# EAGLE board FLD Logic (autorouted) (EAGLE 6.5.0)
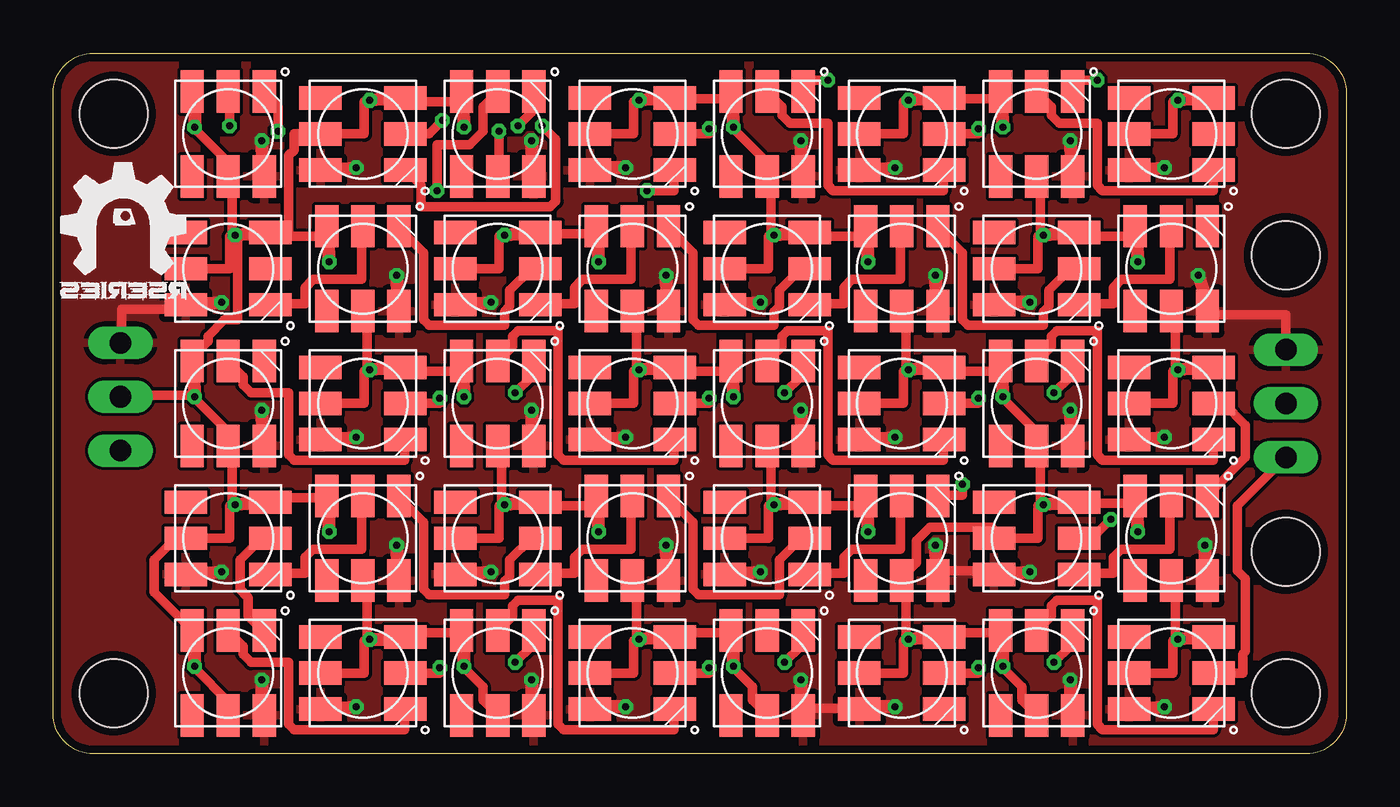
[diagram p0: board, top side]
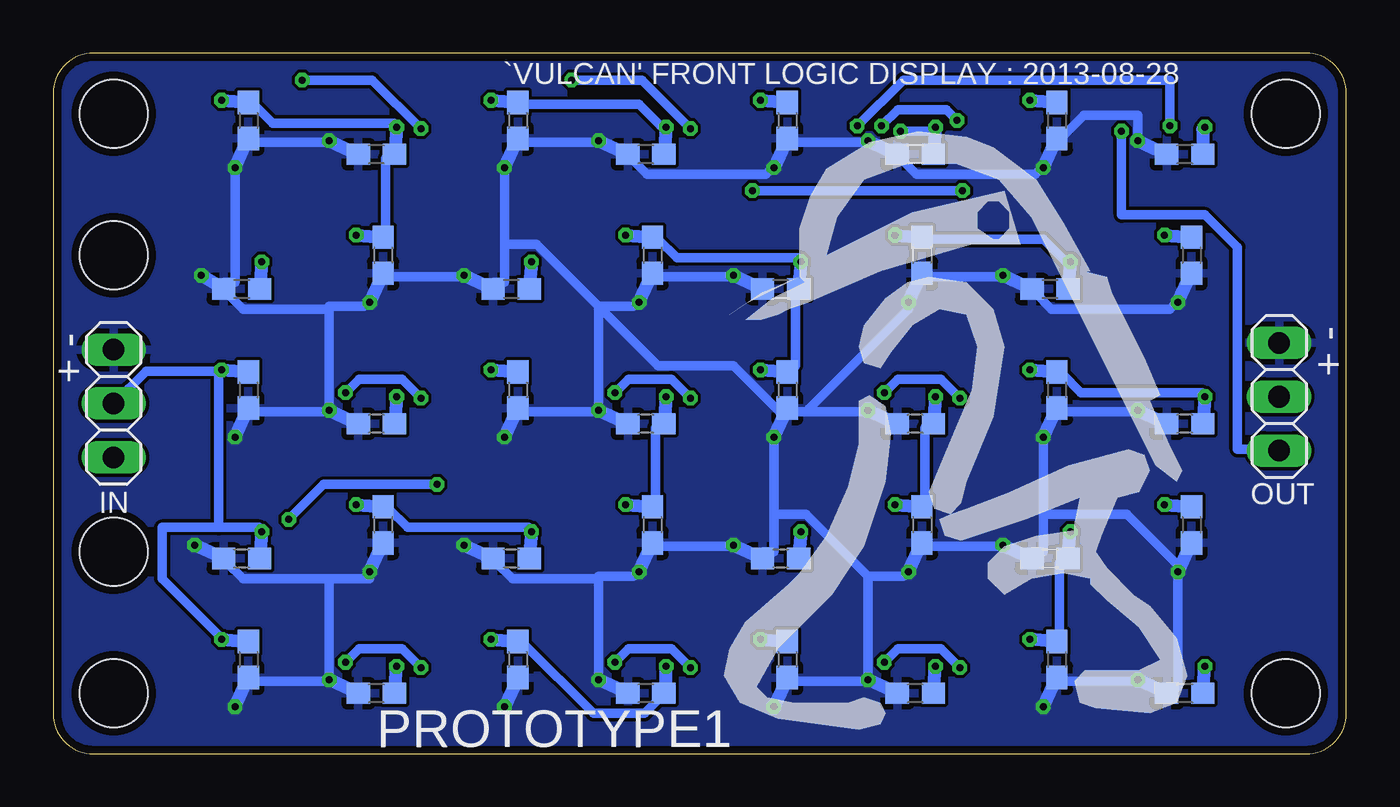
[diagram p1: board, bottom side, seen from below]

Size 60.96 x 33.02 mm. Coordinates in mm from the lower left corner, seen from the top.
Outline: 0,1.91 0,31.11 arc-90 1.91,33.02 59.06,33.02 arc-90 60.96,31.11 60.96,1.91 arc-90 59.06,0 1.91,0 arc-90 0,1.91
Copper layers (1*16): Top 0.0356mm / dielectric 1.5011mm / Bottom 0.0356mm
Design rules "LaenPCBOrder *": minimum track width 18mil, minimum drill 13mil, track to track 6mil, track to pad 6mil, pad to pad 6mil, via to via 6mil, smd to smd 6mil, copper to edge 15mil, drill to drill 6mil, minimum pad ring 7mil, minimum via ring 7mil, stop-mask expansion 4mil, vias tented up to drill 0mil, thermal gap 10mil
Holes 3.2 mm at 58.1,30.16 58.1,2.86 2.86,2.86 2.86,30.16 58.1,9.53 58.1,23.5

## Footprints (pad centres in the part's own frame; a part is rotated, then mirrored left to right if it is on the bottom)
C0603 = smd 1.1 x 1: 1 -0.85,0; 2 0.85,0
1X03 = drill 1.016 long: 1 -2.54,0; 2 0,0; 3 2.54,0
WS2812 = smd 2 x 1.1: DI 2,0; DO 2,-1.7; LEDVDD -2,0; NC -2,1.7; VDD 2,1.7; VSS -2,-1.7

## Placement (x,y rotation side)
C1  0.1uF  [C0603]  51.75,4.45 270 bottom
C2  0.1uF  [C0603]  45.72,2.86 180 bottom
C3  0.1uF  [C0603]  39.05,4.45 270 bottom
C4  0.1uF  [C0603]  33.02,2.86 180 bottom
C5  0.1uF  [C0603]  26.35,4.45 270 bottom
C6  0.1uF  [C0603]  20.32,2.86 180 bottom
C7  0.1uF  [C0603]  13.65,4.45 270 bottom
C8  0.1uF  [C0603]  7.62,2.86 180 bottom
C9  0.1uF  [C0603]  7.3,10.79 270 bottom
C10  0.1uF  [C0603]  13.97,9.21 180 bottom
C11  0.1uF  [C0603]  20,10.79 270 bottom
C12  0.1uF  [C0603]  26.67,9.21 180 bottom
C13  0.1uF  [C0603]  32.7,10.79 270 bottom
C14  0.1uF  [C0603]  39.37,9.21 180 bottom
C15  0.1uF  [C0603]  45.4,10.79 270 bottom
C16  0.1uF  [C0603]  52.07,9.21 180 bottom
C17  0.1uF  [C0603]  51.75,17.14 270 bottom
C18  0.1uF  [C0603]  45.72,15.56 180 bottom
C19  0.1uF  [C0603]  39.05,17.14 270 bottom
C20  0.1uF  [C0603]  33.02,15.56 180 bottom
C21  0.1uF  [C0603]  26.35,17.14 270 bottom
C22  0.1uF  [C0603]  20.32,15.56 180 bottom
C23  0.1uF  [C0603]  13.65,17.14 270 bottom
C24  0.1uF  [C0603]  7.62,15.56 180 bottom
C25  0.1uF  [C0603]  7.3,23.5 270 bottom
C26  0.1uF  [C0603]  13.97,21.91 180 bottom
C27  0.1uF  [C0603]  20,23.5 270 bottom
C28  0.1uF  [C0603]  26.67,21.91 180 bottom
C29  0.1uF  [C0603]  32.7,23.5 270 bottom
C30  0.1uF  [C0603]  39.37,21.91 180 bottom
C31  0.1uF  [C0603]  45.4,23.5 270 bottom
C32  0.1uF  [C0603]  52.07,21.91 180 bottom
C33  0.1uF  [C0603]  51.75,29.84 270 bottom
C34  0.1uF  [C0603]  45.72,28.26 180 bottom
C35  0.1uF  [C0603]  39.05,29.84 270 bottom
C36  0.1uF  [C0603]  33.02,28.26 180 bottom
C37  0.1uF  [C0603]  26.35,29.84 270 bottom
C38  0.1uF  [C0603]  20.32,28.26 180 bottom
C39  0.1uF  [C0603]  13.65,29.84 270 bottom
C40  0.1uF  [C0603]  7.62,28.26 180 bottom
IN  [1X03]  58.1,16.51 270 bottom
LED1  WS2812  [WS2812]  52.7,3.81 0 top
LED2  WS2812  [WS2812]  46.35,3.81 90 top
LED3  WS2812  [WS2812]  40,3.81 0 top
LED4  WS2812  [WS2812]  33.65,3.81 90 top
LED5  WS2812  [WS2812]  27.3,3.81 0 top
LED6  WS2812  [WS2812]  20.96,3.81 90 top
LED7  WS2812  [WS2812]  14.6,3.81 0 top
LED8  WS2812  [WS2812]  8.25,3.81 90 top
LED9  WS2812  [WS2812]  8.25,10.16 0 top
LED10  WS2812  [WS2812]  14.6,10.16 90 top
LED11  WS2812  [WS2812]  20.96,10.16 0 top
LED12  WS2812  [WS2812]  27.3,10.16 90 top
LED13  WS2812  [WS2812]  33.65,10.16 0 top
LED14  WS2812  [WS2812]  40,10.16 90 top
LED15  WS2812  [WS2812]  46.35,10.16 0 top
LED16  WS2812  [WS2812]  52.7,10.16 90 top
LED17  WS2812  [WS2812]  52.7,16.51 0 top
LED18  WS2812  [WS2812]  46.35,16.51 90 top
LED19  WS2812  [WS2812]  40,16.51 0 top
LED20  WS2812  [WS2812]  33.65,16.51 90 top
LED21  WS2812  [WS2812]  27.3,16.51 0 top
LED22  WS2812  [WS2812]  20.96,16.51 90 top
LED23  WS2812  [WS2812]  14.6,16.51 0 top
LED24  WS2812  [WS2812]  8.25,16.51 90 top
LED25  WS2812  [WS2812]  8.25,22.86 0 top
LED26  WS2812  [WS2812]  14.6,22.86 90 top
LED27  WS2812  [WS2812]  20.96,22.86 0 top
LED28  WS2812  [WS2812]  27.3,22.86 90 top
LED29  WS2812  [WS2812]  33.65,22.86 0 top
LED30  WS2812  [WS2812]  40,22.86 90 top
LED31  WS2812  [WS2812]  46.35,22.86 0 top
LED32  WS2812  [WS2812]  52.7,22.86 90 top
LED33  WS2812  [WS2812]  52.7,29.21 0 top
LED34  WS2812  [WS2812]  46.35,29.21 90 top
LED35  WS2812  [WS2812]  40,29.21 0 top
LED36  WS2812  [WS2812]  33.65,29.21 90 top
LED37  WS2812  [WS2812]  27.3,29.21 0 top
LED38  WS2812  [WS2812]  20.96,29.21 90 top
LED39  WS2812  [WS2812]  14.6,29.21 0 top
LED40  WS2812  [WS2812]  8.25,29.21 90 top
OUT  [1X03]  3.18,16.83 270 bottom
U$1  [RSERIES-OSHW-LOGO-SMALL]  6.67,28.26 270 bottom

## Library data of the parts
C1-C40 LED1-LED40 = adafruit
IN OUT = pinhead
U$1 = rseries

## Nets
+5V: C1.1 C2.1 C3.1 C4.1 C5.1 C6.1 C7.1 C8.1 C9.1 C10.1 C11.1 C12.1 C13.1 C14.1 C15.1 C16.1 C17.1 C18.1 C19.1 C20.1 C21.1 C22.1 C23.1 C24.1 C25.1 C26.1 C27.1 C28.1 C29.1 C30.1 C31.1 C32.1 C33.1 C34.1 C35.1 C36.1 C37.1 C38.1 C39.1 C40.1 IN.2 LED1.LEDVDD LED1.VDD LED2.LEDVDD LED2.VDD LED3.LEDVDD LED3.VDD LED4.LEDVDD LED4.VDD LED5.LEDVDD LED5.VDD LED6.LEDVDD LED6.VDD LED7.LEDVDD LED7.VDD LED8.LEDVDD LED8.VDD LED9.LEDVDD LED9.VDD LED10.LEDVDD LED10.VDD LED11.LEDVDD LED11.VDD LED12.LEDVDD LED12.VDD LED13.LEDVDD LED13.VDD LED14.LEDVDD LED14.VDD LED15.LEDVDD LED15.VDD LED16.LEDVDD LED16.VDD LED17.LEDVDD LED17.VDD LED18.LEDVDD LED18.VDD LED19.LEDVDD LED19.VDD LED20.LEDVDD LED20.VDD LED21.LEDVDD LED21.VDD LED22.LEDVDD LED22.VDD LED23.LEDVDD LED23.VDD LED24.LEDVDD LED24.VDD LED25.LEDVDD LED25.VDD LED26.LEDVDD LED26.VDD LED27.LEDVDD LED27.VDD LED28.LEDVDD LED28.VDD LED29.LEDVDD LED29.VDD LED30.LEDVDD LED30.VDD LED31.LEDVDD LED31.VDD LED32.LEDVDD LED32.VDD LED33.LEDVDD LED33.VDD LED34.LEDVDD LED34.VDD LED35.LEDVDD LED35.VDD LED36.LEDVDD LED36.VDD LED37.LEDVDD LED37.VDD LED38.LEDVDD LED38.VDD LED39.LEDVDD LED39.VDD LED40.LEDVDD LED40.VDD OUT.2
DIN: IN.3 LED1.DI
DOUT: LED40.DO OUT.3
GND: C1.2 C2.2 C3.2 C4.2 C5.2 C6.2 C7.2 C8.2 C9.2 C10.2 C11.2 C12.2 C13.2 C14.2 C15.2 C16.2 C17.2 C18.2 C19.2 C20.2 C21.2 C22.2 C23.2 C24.2 C25.2 C26.2 C27.2 C28.2 C29.2 C30.2 C31.2 C32.2 C33.2 C34.2 C35.2 C36.2 C37.2 C38.2 C39.2 C40.2 IN.1 LED1.VSS LED2.VSS LED3.VSS LED4.VSS LED5.VSS LED6.VSS LED7.VSS LED8.VSS LED9.VSS LED10.VSS LED11.VSS LED12.VSS LED13.VSS LED14.VSS LED15.VSS LED16.VSS LED17.VSS LED18.VSS LED19.VSS LED20.VSS LED21.VSS LED22.VSS LED23.VSS LED24.VSS LED25.VSS LED26.VSS LED27.VSS LED28.VSS LED29.VSS LED30.VSS LED31.VSS LED32.VSS LED33.VSS LED34.VSS LED35.VSS LED36.VSS LED37.VSS LED38.VSS LED39.VSS LED40.VSS OUT.1
N$1: LED4.DO LED5.DI
N$2: LED5.DO LED6.DI
N$3: LED3.DO
N$4: LED7.DO LED8.DI
N$5: LED6.DO LED7.DI
N$6: LED17.DO LED18.DI
N$7: LED9.DO LED10.DI
N$8: LED10.DO LED11.DI
N$9: LED12.DO LED13.DI
N$10: LED13.DO LED14.DI
N$11: LED1.DO LED2.DI
N$12: LED2.DO LED3.DI
N$13: LED11.DO LED12.DI
N$14: LED15.DO LED16.DI
N$15: LED14.DO LED15.DI
N$16: LED16.DO LED17.DI
N$17: LED18.DO LED19.DI
N$18: LED20.DO LED21.DI
N$19: LED21.DO LED22.DI
N$20: LED19.DO LED20.DI
N$21: LED23.DO LED24.DI
N$22: LED22.DO LED23.DI
N$23: LED24.DO
N$24: LED25.DO LED26.DI
N$25: LED26.DO LED27.DI
N$26: LED28.DO LED29.DI
N$27: LED29.DO LED30.DI
N$28: LED27.DO LED28.DI
N$29: LED31.DO LED32.DI
N$30: LED30.DO LED31.DI
N$31: LED32.DO
N$32: LED33.DO LED34.DI
N$33: LED34.DO LED35.DI
N$34: LED36.DO LED37.DI
N$35: LED37.DO LED38.DI
N$36: LED35.DO LED36.DI
N$37: LED39.DO LED40.DI
N$38: LED38.DO LED39.DI
N$41: LED8.DO LED9.DI

## Tracks (layer width: path | path; a pad name or v marks a point on that pad's centre or on a via)
+5V  (via drill 0.33, 0.33 pad 0.25)
  Top 0.457: 32.07,5.08 32.07,5.71 LED4.VDD 31.81,5.71 29.53,5.71 LED5.VDD | LED5.LEDVDD 27.37,3.81 27.37,5.33 v27.62,5.4 27.5,5.59 27.5,8 27.37,8.13 LED12.LEDVDD | LED4.LEDVDD 33.59,1.91 32.96,2.54 32.96,3.17 32.19,3.94 v32.07,4.13 | 44.77,5.08 44.77,5.71 LED2.VDD 44.51,5.71 42.23,5.71 LED3.VDD | LED3.LEDVDD 40.07,3.81 40.07,5.33 v40.32,5.4 40.2,5.59 40.2,8 40.07,8.13 LED14.LEDVDD 40.07,8.38 40.7,9.02 40.7,10.03 41.34,10.67 44.26,10.67 44.26,10.29 LED15.LEDVDD 46.42,10.16 46.42,11.68 v46.67,11.75 46.55,11.94 46.55,14.35 46.42,14.48 LED18.LEDVDD 46.42,14.73 46.42,15.11 44.89,16.64 v44.77,16.83 | LED2.LEDVDD 46.29,1.91 45.66,2.54 45.66,3.17 44.89,3.94 v44.77,4.13 | LED17.LEDVDD 52.77,16.51 52.77,18.03 v53.02,18.1 52.9,18.29 52.9,20.7 52.77,20.83 LED32.LEDVDD | LED19.LEDVDD 40.07,16.51 40.07,18.03 v40.32,18.1 40.2,18.29 40.2,20.7 40.07,20.83 LED30.LEDVDD | LED18.VDD 44.39,18.03 42.23,18.03 LED19.VDD | LED1.LEDVDD 52.77,3.81 52.77,5.33 v53.02,5.4 52.9,5.59 52.9,8 52.77,8.13 LED16.LEDVDD | LED16.VDD 50.74,11.81 48.58,11.81 LED15.VDD | LED11.LEDVDD 21.02,10.16 21.02,11.68 v21.27,11.75 21.15,11.94 21.15,14.35 21.02,14.48 LED22.LEDVDD | LED12.VDD 25.34,11.68 23.18,11.68 LED11.VDD | LED23.LEDVDD 14.67,16.51 14.67,18.03 v14.92,18.1 14.8,18.29 14.8,20.7 14.67,20.83 LED26.LEDVDD | LED22.VDD 18.99,18.03 16.83,18.03 LED23.VDD | 19.37,5.08 19.37,5.71 LED6.VDD 19.11,5.71 16.7,5.71 LED7.VDD 16.57,5.46 16.07,5.46 15.87,5.4 | LED7.LEDVDD 14.67,3.81 14.67,5.33 v14.92,5.4 14.8,5.59 14.8,8 14.67,8.13 LED10.LEDVDD | LED6.LEDVDD 20.89,1.91 20.26,2.54 20.26,3.17 19.49,3.94 v19.37,4.13
  Top 0.457: 6.67,5.08 6.67,5.71 LED8.VDD 6.41,5.97 4.76,7.62 4.76,9.14 5.78,10.16 LED9.LEDVDD 8.32,10.16 8.32,11.68 v8.57,11.75 8.45,11.94 8.45,14.35 8.32,14.48 LED24.LEDVDD 8.32,14.73 8.32,15.11 6.79,16.64 v6.67,16.83 6.41,16.89 3.24,16.89 OUT.2 | v6.67,4.13 6.79,3.94 8.19,2.54 8.19,1.91 LED8.LEDVDD | 13.02,11.43 13.02,12.06 LED10.VDD 12.76,12.06 10.48,12.06 LED9.VDD | LED37.LEDVDD 27.37,29.21 27.37,30.73 v27.62,30.8 | LED37.VDD 29.53,30.86 31.69,30.86 LED36.VDD | LED29.LEDVDD 33.72,22.86 33.72,24.38 v33.97,24.45 33.85,24.64 33.85,27.05 33.72,27.18 LED36.LEDVDD 33.72,27.43 33.72,27.81 32.19,29.34 v32.07,29.53 | LED30.VDD 38.04,24.38 35.88,24.38 LED29.VDD | LED31.LEDVDD 46.42,22.86 46.42,24.38 v46.67,24.45 46.55,24.64 46.55,27.05 46.42,27.18 LED34.LEDVDD | LED32.VDD 50.74,24.38 48.58,24.38 LED31.VDD | LED33.LEDVDD 52.77,29.21 52.77,30.73 v53.02,30.8 | LED35.LEDVDD 40.07,29.21 40.07,30.73 v40.32,30.8 | LED35.VDD 42.23,30.86 44.39,30.86 LED34.VDD | v21.02,29.34 21.02,27.3 LED38.LEDVDD | v14.92,30.8 14.67,30.73 14.67,29.21 LED39.LEDVDD 11.37,29.21 11.37,28.45 11.11,28.19 11.11,24.51 LED25.VDD 10.48,24.38 12.64,24.38 LED26.VDD | LED38.VDD 18.99,30.73 16.83,30.73 LED39.VDD | LED25.LEDVDD 8.32,22.86 8.32,24.38 v8.57,24.45 | v8.57,24.45 8.45,24.64 8.45,27.05 8.32,27.18 LED40.LEDVDD 8.32,27.43 8.32,27.81 6.79,29.34 v6.67,29.53 | LED13.LEDVDD 33.72,10.16 33.72,11.68 v33.97,11.75 33.85,11.94 33.85,14.35 33.72,14.48 LED20.LEDVDD | LED14.VDD 38.04,11.68 35.88,11.68 LED13.VDD | LED27.LEDVDD 21.02,22.86 21.02,24.38 v21.27,24.45 | LED27.VDD 23.18,24.51 25.34,24.51 LED28.VDD
  Top 0.457: LED21.LEDVDD 27.37,16.51 27.37,18.03 v27.62,18.1 27.5,18.29 27.5,20.7 27.37,20.83 LED28.LEDVDD | LED20.VDD 31.69,18.03 29.53,18.03 LED21.VDD | LED24.VDD 6.67,18.8 7.3,19.43 7.3,19.68 8.06,20.45 8.7,20.45 8.7,24.26 v8.57,24.45
  Top 0.61: v6.67,4.13 6.67,5.08 | v14.92,5.4 15.87,5.4 | v19.37,4.13 19.37,5.08 | LED5.VDD v27.62,5.4 | LED3.VDD v40.32,5.4 | LED1.VDD v53.02,5.4 | LED16.VDD v51.12,10.48 | LED15.VDD v46.67,11.75 | LED14.VDD v38.42,10.48 | LED13.VDD v33.97,11.75 | LED12.VDD v25.72,10.48 | LED11.VDD v21.27,11.75 | v13.02,10.48 13.02,11.43 | LED9.VDD v8.57,11.75 | LED24.VDD v6.67,16.83 | LED25.VDD v8.57,24.45 | LED26.VDD v13.02,23.18 | LED23.VDD v14.92,18.1 | LED22.VDD v19.37,16.83 | LED27.VDD v21.27,24.45 | LED21.VDD v27.62,18.1 | LED20.VDD v32.07,16.83 | LED19.VDD v40.32,18.1 | LED18.VDD v44.77,16.83 | LED17.VDD v53.02,18.1 | LED32.VDD v51.12,23.18 | LED31.VDD v46.67,24.45 | LED30.VDD v38.42,23.18 | LED29.VDD v33.97,24.45 | LED28.VDD v25.72,23.18 | LED39.VDD v14.92,30.8 | LED38.VDD v19.37,29.53 | LED37.VDD v27.62,30.8 | LED36.VDD v32.07,29.53 | LED35.VDD v40.32,30.8 | LED34.VDD v44.77,29.53 | LED33.VDD v53.02,30.8 | LED40.VDD 6.67,31.1 v6.67,29.53 | v32.07,4.13 32.07,5.08 | v44.77,4.13 44.77,5.08
  Bottom 0.457: C4.1 32.32,2.67 33.08,1.91 35.5,1.91 38.8,5.21 C3.1 | IN.2 56.58,18.03 53.28,18.03 v53.02,18.1 53.15,17.91 53.15,10.67 | 53.15,10.67 51.24,10.67 v51.12,10.48 | 53.15,10.67 55.82,10.67 55.82,8.26 53.15,5.59 v53.02,5.4 | C11.1 19.88,11.94 19.88,15.37 19.62,15.37 C22.1 | C7.1 13.53,5.59 13.53,9.02 13.27,9.02 C10.1 | C23.1 13.4,17.91 12.51,17.02 6.79,17.02 v6.67,16.83 | C33.1 51.5,30.61 50.61,29.72 44.89,29.72 v44.77,29.53 | C31.1 45.28,24.64 45.28,28.07 45.02,28.07 C34.1 | v32.07,29.53 32.32,29.59 33.34,30.61 38.8,30.61 C35.1 | v21.02,29.34 19.62,29.34 v19.37,29.53 | C28.1 25.97,21.72 25.97,18.29 26.23,18.29 C21.1 | C13.1 32.58,11.94 32.58,15.37 32.32,15.37 C20.1 | v13.02,23.18 13.27,23.24 14.29,24.26 19.75,24.26 C27.1 | C29.1 32.45,24.26 31.56,23.37 25.84,23.37 v25.72,23.18 | C15.1 45.15,11.56 44.26,10.67 38.54,10.67 v38.42,10.48
  Bottom 0.61: C8.1 v6.67,4.13 | C7.1 v14.92,5.4 | C6.1 v19.37,4.13 | v27.62,5.4 C5.1 | v40.32,5.4 C3.1 | v53.02,5.4 C1.1 | v51.12,10.48 C16.1 | v46.67,11.75 C15.1 | v38.42,10.48 C14.1 | v33.97,11.75 C13.1 | v25.72,10.48 C12.1 | v21.27,11.75 C11.1 | C10.1 v13.02,10.48 | v8.57,11.75 C9.1 | v6.67,16.83 C24.1 | v8.57,24.45 C25.1 | v13.02,23.18 C26.1 | v14.92,18.1 C23.1 | v19.37,16.83 C22.1 | v21.27,24.45 C27.1 | v27.62,18.1 C21.1 | v32.07,16.83 C20.1 | v40.32,18.1 C19.1 | v44.77,16.83 C18.1 | v53.02,18.1 C17.1 | v51.12,23.18 C32.1 | v46.67,24.45 C31.1 | v38.42,23.18 C30.1 | v33.97,24.45 C29.1 | v25.72,23.18 C28.1 | v14.92,30.8 C39.1 | v19.37,29.53 C38.1 | v27.62,30.8 C37.1 | v32.07,29.53 C36.1 | v40.32,30.8 C35.1 | v44.77,29.53 C34.1 | v53.02,30.8 C33.1 | v6.67,29.53 6.77,29.43 C40.1 | C4.1 32.07,2.86 v32.07,4.13 | C2.1 v44.77,4.13
DIN
  Top 0.457: LED1.DI 56.07,3.81 56.07,4.7 56.2,4.83 56.2,8.26 55.82,8.64 55.82,11.68 IN.3
DOUT  (via drill 0.33)
  Top 0.457: v10.6,29.34 10.6,30.48 9.97,31.11 LED40.DO
  Bottom 0.457: v10.6,29.34 10.6,25.4 6.67,25.4 5.14,23.88 5.14,14.35 3.24,14.35 OUT.3
GND  (via drill 0.33 pad 0.25)
  Top 0.457: 54.29,21.59 54.29,20.95 LED32.VSS 54.55,20.7 58.1,20.7 IN.1 | 24.76,27.43 25.21,27.43 LED37.VSS 25.46,27.56 25.84,27.56 26.03,27.62 | 35.56,27.56 35.62,27.56 LED36.VSS | 45.09,21.27 44.89,21.21 44.39,21.21 LED31.VSS | 10.16,2.22 9.97,2.29 LED8.VSS 9.84,2.41 9.84,2.54 | 22.54,2.54 22.54,2.41 LED6.VSS | 26.03,2.22 25.84,2.16 25.34,2.16 LED5.VSS | 47.94,2.54 47.94,2.41 LED2.VSS | 54.29,8.89 54.29,8.26 LED16.VSS | LED14.VSS 41.97,8.64 44.13,8.64 LED15.VSS | LED25.VSS 6.03,20.95 3.24,20.95 3.24,19.43 OUT.1 | 35.56,2.16 35.5,2.16 LED4.VSS | 35.24,2.41 35.37,2.41 LED4.VSS | 38.74,2.22 38.54,2.16 38.04,2.16 LED3.VSS 37.78,2.16 35.75,2.16 LED4.VSS
  Top 0.61: v9.84,3.49 9.84,2.54 | LED7.VSS v14.29,2.22 | v22.54,3.49 22.54,2.54 | v39.69,2.22 38.74,2.22 | LED13.VSS v33.34,8.57 | LED1.VSS v52.39,2.22 | v54.29,9.84 54.29,8.89 | LED15.VSS v46.04,8.57 | v41.59,9.84 LED14.VSS 41.71,8.46 | v28.89,9.84 LED12.VSS 29.01,8.46 | LED11.VSS v20.64,8.57 | v16.19,9.84 LED10.VSS 16.3,8.46 | LED9.VSS v7.94,8.57 | v9.84,16.19 LED24.VSS 9.96,14.81 | LED25.VSS v7.94,21.27 | v16.19,22.54 LED26.VSS 16.3,21.16 | LED23.VSS v14.29,14.92 | LED27.VSS v20.64,21.27 | v22.54,16.19 LED22.VSS 22.66,14.81 | LED21.VSS v26.99,14.92 | v35.24,16.19 LED20.VSS 35.35,14.81 | LED19.VSS v39.69,14.92 | v47.94,16.19 LED18.VSS 48.06,14.81 | LED17.VSS v52.39,14.92 | v53.97,22.54 54.29,21.59 | v46.04,21.27 45.09,21.27 | v41.59,22.54 LED30.VSS 41.71,21.16 | LED29.VSS v33.34,21.27 | v28.89,22.54 LED28.VSS 29.01,21.16 | v9.84,28.89 LED40.VSS 9.96,27.51 | LED39.VSS v14.29,27.62 | LED38.VSS v22.54,28.89 | v26.99,27.62 26.03,27.62 | LED36.VSS v35.24,28.89 | LED35.VSS v39.69,27.62 | v47.94,28.89 LED34.VSS 48.06,27.51 | LED33.VSS v52.39,27.62 | 48.06,2.11 LED2.VSS | 35.56,2.11 35.56,2.16 35.56,2.22 | 22.66,2.11 LED6.VSS | 10.16,2.11 10.16,2.22 | 35.56,27.51 35.56,27.56 35.56,27.62 | 24.76,27.53 24.76,27.43 24.76,27.3 | v35.24,3.49 35.24,2.41 35.24,2.22 | v47.94,3.49 47.94,2.54 | v26.99,2.22 26.03,2.22
  Bottom 0.457: v47.94,28.89 48.2,28.83 51.5,28.83 C33.2 | v52.39,27.62 52.39,22.23 52.9,22.23 C32.2 52.77,21.72 52.01,20.95 47.94,20.95 | v9.84,28.89 9.84,30.1 12.38,30.1 13.4,29.08 C39.2 | C37.2 26.1,28.83 22.8,28.83 v22.54,28.89 | v14.29,27.62 14.54,27.43 14.67,27.3 20.26,27.3 21.02,28.07 C38.2 | C19.2 38.8,16.13 35.5,16.13 v35.24,16.19 35.24,20.95 | 35.24,21.08 35.24,20.95 | 35.24,21.08 33.59,21.08 v33.34,21.27 | v28.89,22.54 29.15,22.48 32.45,22.48 C29.2 | C17.2 51.5,16.13 48.2,16.13 v47.94,16.19 47.94,20.95 | v35.24,28.89 35.5,28.83 38.8,28.83 C35.2 | C31.2 45.15,22.48 41.85,22.48 v41.59,22.54 | 39.69,24 39.69,22.23 40.2,22.23 C30.2 | 39.69,24 v39.69,27.62 | 47.94,20.95 47.94,21.08 46.29,21.08 v46.04,21.27 | 35.24,21.08 38.16,24 39.69,24 | v26.99,27.62 27.24,27.43 27.37,27.3 32.96,27.3 33.72,28.07 C36.2 | v9.84,3.49 10.1,3.43 13.4,3.43 C7.2 | v7.94,8.57 7.94,3.17 8.45,3.17 C8.2 | C5.2 26.1,3.43 22.8,3.43 v22.54,3.49 22.54,8.38 | v9.84,16.19 10.1,16.13 13.4,16.13 C23.2 | 14.29,11.3 14.29,9.53 14.8,9.53 C10.2 | 14.29,11.3 v14.29,14.92 | C11.2 19.75,9.78 16.45,9.78 v16.19,9.84 | 22.54,8.38 20.89,8.38 v20.64,8.57 | 14.29,11.3 10.35,11.3 8.06,9.02 7.79,8.89 | C1.2 51.5,3.43 48.2,3.43 v47.94,3.49 47.94,8.26 | 47.94,8.26 46.04,8.26 v46.04,8.57 | 47.94,8.26 52.01,8.26 52.77,9.02 C16.2 | v16.19,22.54 16.45,22.48 19.75,22.48 C27.2 | 25.34,16.13 26.1,16.13 C21.2 26.73,16.13 28.89,18.29 32.45,18.29 35.12,20.95 35.24,20.95 | 25.34,16.13 22.8,16.13 v22.54,16.19 | 26.99,11.3 26.99,9.53 27.5,9.53 C12.2 | 26.99,11.3 v26.99,14.92 | C13.2 32.45,9.78 29.15,9.78 v28.89,9.84 | v20.64,21.27 20.64,20.95 25.34,16.26 25.34,16.13
  Bottom 0.457: 35.24,8.26 35.24,8.38 33.59,8.38 v33.34,8.57 | 35.24,8.26 v35.24,3.49 | v7.94,21.27 8.19,21.08 8.32,20.95 13.91,20.95 14.67,21.72 C26.2 | 35.24,8.26 39.31,8.26 40.07,9.02 C14.2 | 22.54,8.38 25.46,11.3 26.99,11.3
  Bottom 0.61: C8.2 v9.84,3.49 | v14.29,2.22 C7.2 | C6.2 v22.54,3.49 | C3.2 v39.69,2.22 | v33.34,8.57 C13.2 | v52.39,2.22 C1.2 | C16.2 v54.29,9.84 | v46.04,8.57 C15.2 | v41.59,9.84 C14.2 | v28.89,9.84 C12.2 | v20.64,8.57 C11.2 | v16.19,9.84 C10.2 | v7.94,8.57 7.79,8.89 C9.2 | v9.84,16.19 C24.2 | v7.94,21.27 C25.2 | v16.19,22.54 C26.2 | v14.29,14.92 C23.2 | v20.64,21.27 C27.2 | v22.54,16.19 C22.2 | v26.99,14.92 C21.2 | v35.24,16.19 C20.2 | v39.69,14.92 C19.2 | v47.94,16.19 C18.2 | v52.39,14.92 C17.2 | C32.2 v53.97,22.54 | C31.2 v46.04,21.27 | v41.59,22.54 C30.2 | v33.34,21.27 C29.2 | v28.89,22.54 C28.2 | v9.84,28.89 C40.2 | v14.29,27.62 C39.2 | v22.54,28.89 C38.2 | C37.2 v26.99,27.62 | v35.24,28.89 C36.2 | v39.69,27.62 C35.2 | v47.94,28.89 C34.2 | v52.39,27.62 C33.2 | C4.2 v35.24,3.49 | C2.2 v47.94,3.49 | C5.2 v26.99,2.22
  pour Top: -1.59,33.66 -1.59,-1.27 62.55,-1.27 62.55,33.66
  pour Bottom: -1.59,34.29 -2.86,34.29 -2.86,-1.91 63.18,-1.91 63.18,-0.64 63.18,35.56 -1.59,35.56
N$1  (via drill 0.33)
  Top 0.457: LED5.DI 30.92,3.81 v30.92,4.06 | v34.48,4.32 35.24,5.08 35.24,5.71 LED4.DO
  Bottom 0.457: v30.92,4.06 31.81,4.95 33.85,4.95 v34.48,4.32
N$2
  Top 0.457: LED6.DI 21.02,5.84 21.65,6.48 21.65,6.99 21.91,7.24 23.81,7.24 23.81,1.4 24.07,1.14 29.27,1.14 29.27,2.03 LED5.DO
N$4
  Top 0.457: LED8.DI 8.32,5.71 8.95,5.08 8.95,4.7 9.33,4.32 11.11,4.32 11.11,1.4 11.37,1.14 16.57,1.14 16.57,2.03 LED7.DO
N$5  (via drill 0.33)
  Top 0.457: LED7.DI 18.22,3.81 v18.22,4.06 | v21.78,4.32 22.54,5.08 22.54,5.71 LED6.DO
  Bottom 0.457: v18.22,4.06 19.11,4.95 21.15,4.95 v21.78,4.32
N$6
  Top 0.457: LED18.DI 46.42,18.54 47.05,19.18 47.05,19.68 47.31,19.94 49.21,19.94 49.21,14.1 49.47,13.84 54.67,13.84 54.67,14.73 LED17.DO
N$7
  Top 0.457: LED9.DO 10.35,8.51 11.87,8.51 11.87,9.27 12.26,9.65 14.54,9.65 14.54,12.06 LED10.DI
N$8
  Top 0.457: LED11.DI 22.54,10.16 21.53,9.14 21.53,8.38 21.27,8.13 21.27,7.49 17.72,7.49 17.46,7.75 17.46,10.92 16.32,12.06 LED10.DO
N$9
  Top 0.457: LED13.DI 35.24,10.16 34.23,9.14 34.23,7.49 30.42,7.49 30.16,7.75 30.16,10.92 29.02,12.06 LED12.DO
N$10
  Top 0.457: LED13.DO 35.75,8.51 37.27,8.51 37.27,9.27 37.66,9.65 39.94,9.65 39.94,12.06 LED14.DI
N$11
  Top 0.457: LED2.DI 46.42,5.84 47.05,6.48 47.05,6.99 47.31,7.24 49.21,7.24 49.21,1.4 49.47,1.14 54.67,1.14 54.67,2.03 LED1.DO
N$12  (via drill 0.33)
  Top 0.457: LED3.DI 43.62,3.81 v43.62,4.06 | v47.18,4.32 47.94,5.08 47.94,5.71 LED2.DO
  Bottom 0.457: v43.62,4.06 44.51,4.95 46.55,4.95 v47.18,4.32
N$13
  Top 0.457: LED11.DO 23.05,8.51 24.57,8.51 24.57,9.27 24.96,9.65 27.24,9.65 27.24,12.06 LED12.DI
N$14
  Top 0.457: LED15.DO 48.45,8.51 49.97,8.51 49.97,9.27 50.36,9.65 52.64,9.65 52.64,12.06 LED16.DI
N$15  (via drill 0.33)
  Top 0.457: v42.86,12.7 42.86,12.19 41.72,12.19 LED14.DO | v49.85,11.05 48.96,10.16 LED15.DI
  Bottom 0.457: v42.86,12.7 48.2,12.7 v49.85,11.05
N$16
  Top 0.457: LED17.DI 55.18,16.51 56.2,15.49 56.2,13.97 54.42,12.19 LED16.DO
N$17  (via drill 0.33)
  Top 0.457: LED19.DI 43.62,16.51 v43.62,16.76 | v47.18,17.02 47.94,17.78 47.94,18.41 LED18.DO
  Bottom 0.457: v43.62,16.76 44.51,17.65 46.55,17.65 v47.18,17.02
N$18  (via drill 0.33)
  Top 0.457: LED21.DI 30.92,16.51 v30.92,16.76 | v34.48,17.02 35.24,17.78 35.24,18.41 LED20.DO
  Bottom 0.457: v30.92,16.76 31.81,17.65 33.85,17.65 v34.48,17.02
N$19
  Top 0.457: LED22.DI 21.02,18.54 21.65,19.18 21.65,19.68 21.91,19.94 23.81,19.94 23.81,14.1 24.07,13.84 29.27,13.84 29.27,14.73 LED21.DO
N$20
  Top 0.457: LED20.DI 33.72,18.54 34.35,19.18 34.35,19.68 34.61,19.94 36.51,19.94 36.51,14.1 36.77,13.84 41.97,13.84 41.97,14.73 LED19.DO
N$21
  Top 0.457: LED24.DI 8.32,18.41 8.95,17.78 8.95,17.4 9.33,17.02 11.11,17.02 11.11,14.1 11.37,13.84 16.57,13.84 16.57,14.73 LED23.DO
N$22  (via drill 0.33)
  Top 0.457: LED23.DI 18.22,16.51 v18.22,16.76 | v21.78,17.02 22.54,17.78 22.54,18.41 LED22.DO
  Bottom 0.457: v18.22,16.76 19.11,17.65 21.15,17.65 v21.78,17.02
N$24
  Top 0.457: LED25.DO 10.35,21.21 11.87,21.21 11.87,21.97 12.26,22.35 14.54,22.35 14.54,24.77 LED26.DI
N$25
  Top 0.457: LED27.DI 22.54,22.86 21.53,21.84 21.53,21.08 21.27,20.83 21.27,20.19 17.72,20.19 17.46,20.45 17.46,23.62 16.32,24.77 LED26.DO
N$26
  Top 0.457: LED29.DI 35.24,22.86 34.23,21.84 34.23,21.08 33.97,20.83 33.97,20.19 30.42,20.19 30.16,20.45 30.16,23.62 29.02,24.77 LED28.DO
N$27
  Top 0.457: LED29.DO 35.75,21.21 37.27,21.21 37.27,21.97 37.66,22.35 39.94,22.35 39.94,24.77 LED30.DI
N$28
  Top 0.457: LED27.DO 23.05,21.21 24.57,21.21 24.57,21.97 24.96,22.35 27.24,22.35 27.24,24.77 LED28.DI
N$29
  Top 0.457: LED31.DO 48.45,21.21 49.97,21.21 49.97,21.97 50.36,22.35 52.64,22.35 52.64,24.77 LED32.DI
N$30
  Top 0.457: LED31.DI 47.94,22.86 46.93,21.84 46.93,21.08 46.67,20.83 46.67,20.19 43.12,20.19 42.86,20.45 42.86,23.62 41.72,24.77 LED30.DO
N$32
  Top 0.457: LED34.DI 46.42,31.11 47.05,30.48 47.05,30.1 47.43,29.72 49.21,29.72 49.21,26.8 49.47,26.54 54.67,26.54 54.67,27.43 LED33.DO
N$33  (via drill 0.33)
  Top 0.457: LED35.DI 43.62,29.21 v43.62,29.46 | v49.21,31.75 48.07,31.75 48.07,31.24 LED34.DO
  Bottom 0.457: v43.62,29.46 45.91,31.75 v49.21,31.75
N$34  (via drill 0.33)
  Top 0.457: LED37.DI 30.92,29.21 v30.92,29.46 | v36.51,31.75 35.37,31.75 35.37,31.24 LED36.DO
  Bottom 0.457: v30.92,29.46 33.21,31.75 v36.51,31.75
N$35  (via drill 0.33)
  Top 0.457: v18.1,26.54 18.1,28.7 19.62,28.7 20.26,29.34 20.26,30.48 20.89,31.11 LED38.DI | v28,26.54 29.27,26.54 29.27,27.43 LED37.DO
  Bottom 0.457: v28,26.54 v18.1,26.54
N$36
  Top 0.457: LED36.DI 33.72,31.11 34.35,30.48 34.35,30.1 34.73,29.72 36.51,29.72 36.51,26.8 36.77,26.54 41.97,26.54 41.97,27.43 LED35.DO
N$37  (via drill 0.33)
  Top 0.457: v8.32,29.59 8.32,31.11 LED40.DI | v23.05,29.59 23.69,28.96 23.69,26.04 23.43,25.78 17.34,25.78 17.34,26.8 16.7,27.43 LED39.DO
  Bottom 0.457: v8.32,29.59 8.32,31.75 20.89,31.75 v23.05,29.59
N$38  (via drill 0.33)
  Top 0.457: LED39.DI 17.72,29.21 v18.35,29.84 | v21.91,29.59 22.54,30.23 22.54,31.11 LED38.DO
  Bottom 0.457: v18.35,29.84 18.86,30.35 21.15,30.35 v21.91,29.59
N$41
  Top 0.457: LED9.DI 9.84,10.16 8.83,9.14 8.83,7.75 9.21,7.37 9.21,6.48 9.84,5.84 LED8.DO

## Text on the board
bNames: `VULCAN' FRONT LOGIC DISPLAY : 2013-08-28 | + - | + - | PROTOTYPE1